# Altium PCB ShieldBoard.PcbDoc
Units mil, origin at the board's own origin, x right, y up, seen from the top; angles counter-clockwise.
Board outline 2700 x 2100 mil, 2 copper layers (Top Layer, Bottom Layer), stack 62.8 mil thick; 15 components, 31 nets, 62 pads, 18 vias.
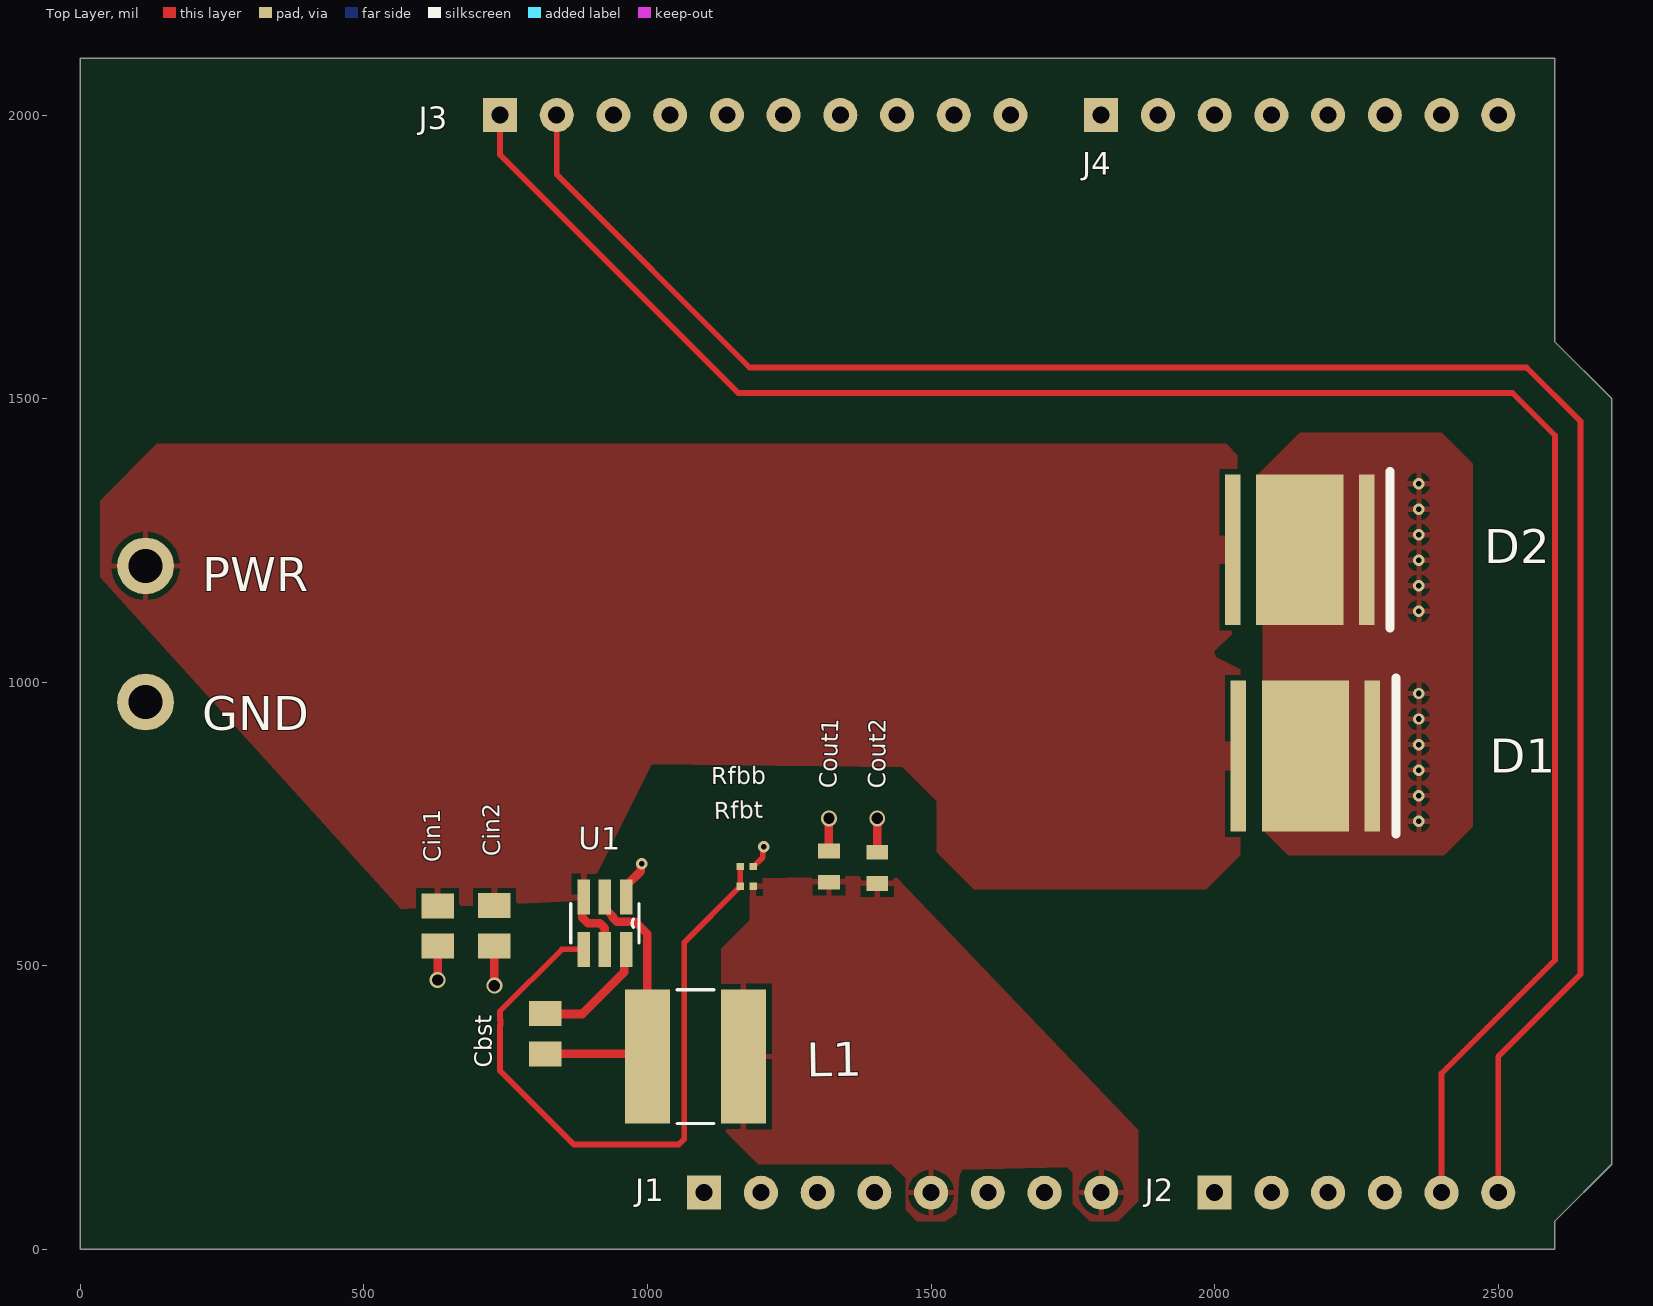
[diagram p0: Top Layer view]
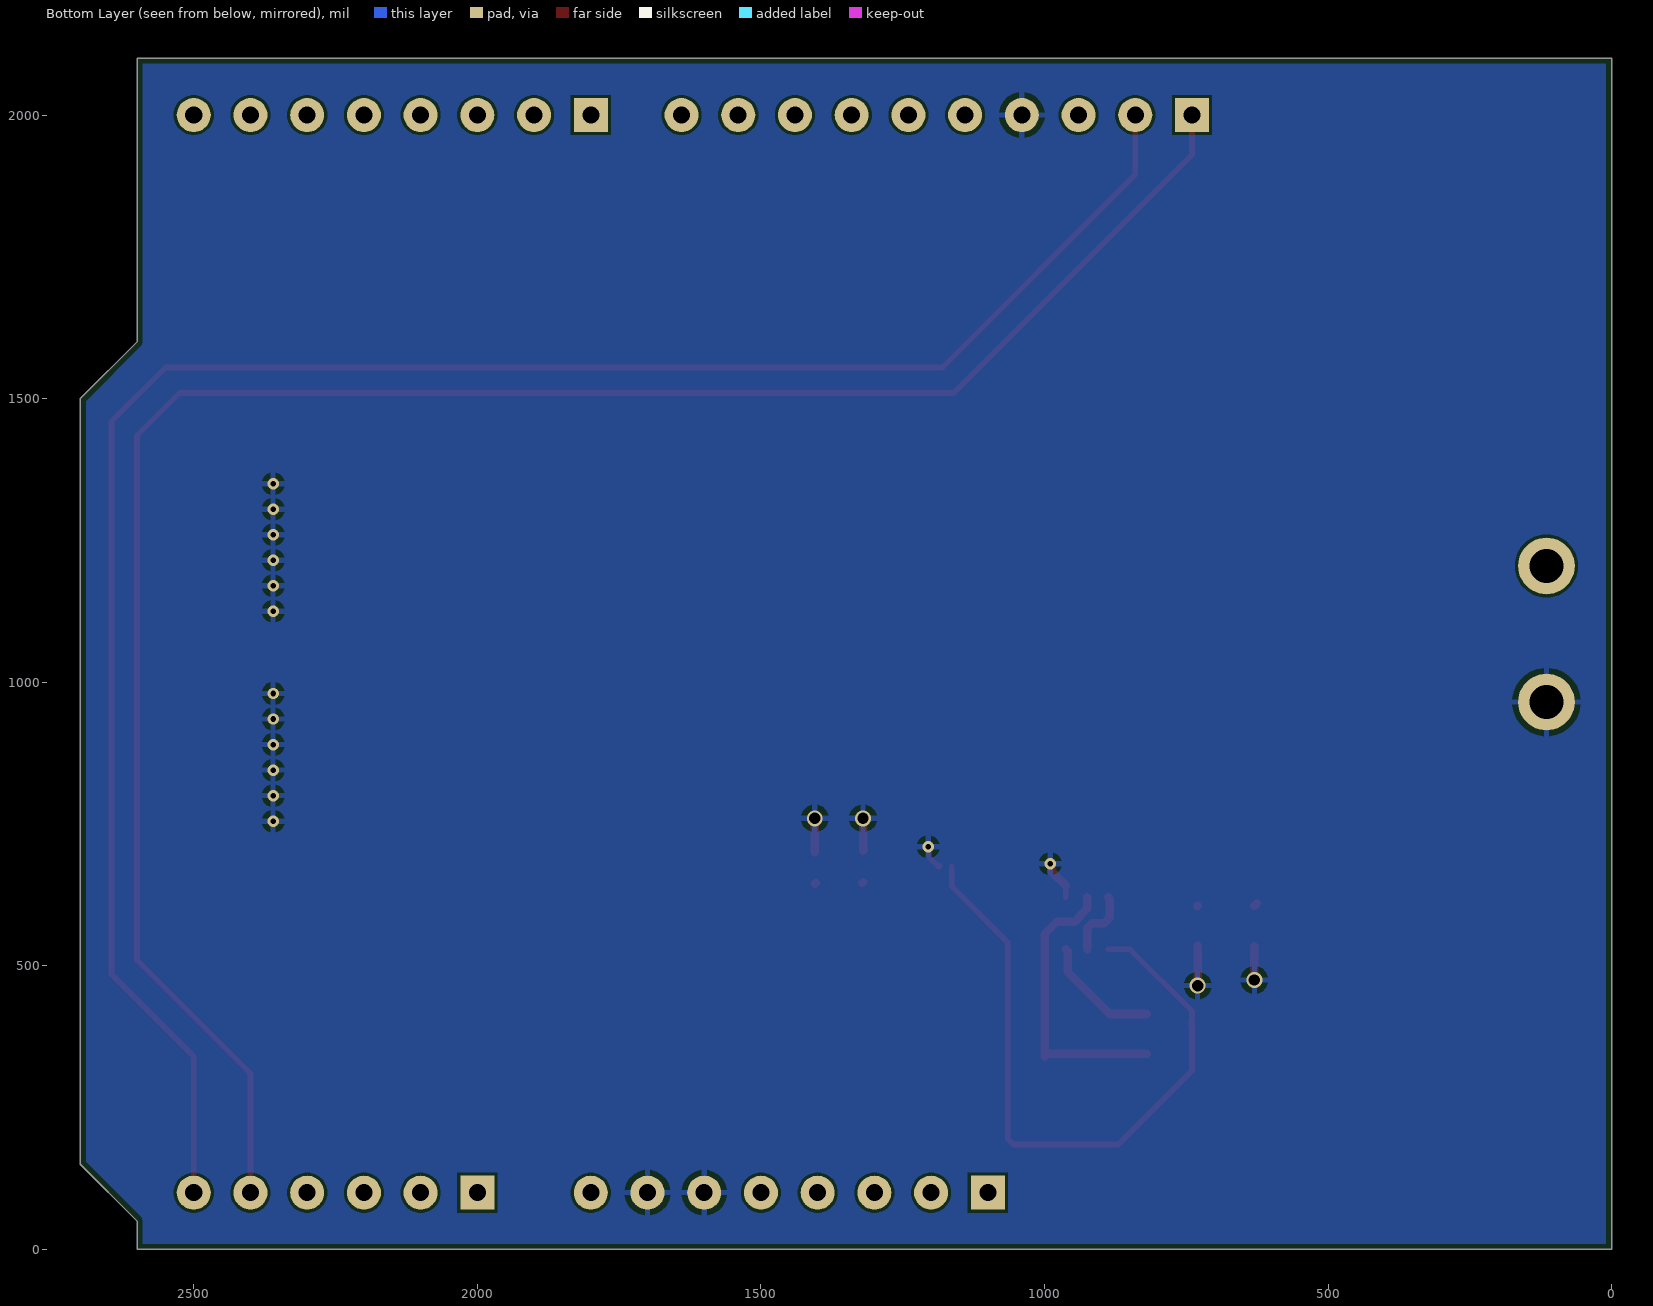
[diagram p1: Bottom Layer view, seen from below]

## Layer stack, top to bottom
Top Solder: solder mask 0.4, Solder Resist, Dk 3.5
Top Layer: signal copper 1.4
Dielectric 1: dielectric 60, FR-4, Dk 4.8
Bottom Layer: signal copper 1.4
Bottom Solder: solder mask 0.4, Solder Resist, Dk 3.5

## Board outline
2600,1600 2700,1500 2700,150 2600,50 2600,0 0,0 0,2100 2600,2100

## Design rules (kind name [scope] priority, off if disabled: settings)
BoardOutlineClearance [All] p1: gap=10 ignorepadtopadclearanceinfootprint=FALSE
Clearance [All] p1: gap=5 ignorepadtopadclearanceinfootprint=TRUE except(0: Arc-Hole Track-Hole SMDPad-Hole THPad-Hole Via-Hole Fill-Hole Poly-Hole Region-Hole Text-Hole)
HoleToHoleClearance [All] p1: gap=5 allowstackedmicrovias=TRUE
MinimumSolderMaskSliver [All] p1: minsoldermaskwidth=5
PolygonConnect [All] p1: connectstyle=Relief reliefconductorwidth=10 reliefentries=4 polygonreliefangle="90 Angle" airgapwidth=10
RoutingVias [All] p1: holewidth=10 width=18 viastyle="Through Hole" minholewidth=6 minwidth=14 maxholewidth=28 maxwidth=50
SilkToSilkClearance [All] p1: silktosilkclearance=5
SilkToSolderMaskClearance [IsPad] p1: minsilkscreentomaskgap=5 clearancetoexposedcopper=TRUE
SolderMaskExpansion [All] p1: expansion=0 istentingtop=FALSE
Width [All] p1: maxlimit=30 minlimit=10 preferedwidth=10
26 further rules are at their usual default settings.

## Components (designator, comment, footprint, x,y, rotation, side; value= is the part's Value field where it differs from the comment)
Cbst "08053C104KAT2A" 0805 820,380 r90 top value=Value
Cin1 "C2012X5R1V106K08" 0805 730,570.5 r270 top value=Value
Cin2 "C2012X5R1V106K08" 0805 630,570 r270 top value=Value
Cout1 "C1608X5R1A226M08" 0603 1320,675 r90 top value=Value
Cout2 "C1608X5R1A226M08" 0603 1405,672.5 r90 top value=Value
D1 "MKRAWT-00-0000-0D0HG230H" CREE-MK-R-2_V 2160,870 r0 top
D2 "MKRAWT-00-0000-0D0HG230H" CREE-MK-R-2_V 2150,1233.5 r0 top
J1 "1x8 Header" PCBComponent_2 1100,100 r0 top
J2 "1x6 Header" PCBComponent_1 2000,100 r0 top
J3 "1x10 Header" PCBComponent_3 740,2000 r0 top
J4 "1x8 Header" PCBComponent_2 1800,2000 r0 top
L1 "SRN6045-4R7Y" SRN6045 1084.65,340 r0 top value=Value
Rfbb "RC0201FR-0710KL" 0201 1175,675 r0 top value=Value
Rfbt "RC0201FR-0756K2L" 0201 1175,640 r180 top value=Value
U1 "TPS562200DDCR" DDC0006A 925,575 r270 top value=Value

## Footprints (in the part's own frame and the unit in brackets; to place one, negate y for a bottom-side part, rotate by r counter-clockwise, add the part's x,y. Pads: shape width x height; smd on the part's side, far side on the other; paste and mask are expansions set on the pad)
0201 [mil]
  rect 14x13 smd: 1(-11.5,0) 2(11.5,0)
  body extent 0,0 10,10, height 10
0603 [mil]
  rect 26x38 smd: 1(-27.5,0) 2(27.5,0)
  body extent 0,0 10,10, height 10
0805 [mil]
  rect 44x57 smd: 1(-35.5,0) 2(35.5,0)
  body extent 0,0 10,10, height 10
CREE-MK-R-2_V [mm] "SMD, 2-Leads, Body 7x7mm, Thermal Pad 3.9x6.76mm"
  rect 0.7x6.76 smd: 1(-3,0) 2(3,0)
  rect 3.9x6.76 smd: 3(0,0)
  silkscreen extent 4.05,-3.5 4.05,3.5, body extent -3.5,-3.5 3.5,3.5, height 4.1
DDC0006A [mil]
  rect 62x22 smd paste-4 mask+2: 1(-46,37.4) 2(-46,0) 3(-46,-37.4) 4(46,-37.4) 5(46,0) 6(46,37.4)
  silkscreen extent -35,-60 35,60, body extent 0,0 10,10, height 10
PCBComponent_1 [mil]
  rect 60x60 hole 30: 1(0,0)
  round 60 hole 30: 2(100,0) 3(200,0) 4(300,0) 5(400,0) 6(500,0)
PCBComponent_2 [mil]
  rect 60x60 hole 30: 1(0,0)
  round 60 hole 30: 2(100,0) 3(200,0) 4(300,0) 5(400,0) 6(500,0) 7(600,0) 8(700,0)
PCBComponent_3 [mil]
  rect 60x60 hole 30: 1(0,0)
  round 60 hole 30: 2(100,0) 3(200,0) 4(300,0) 5(400,0) 6(500,0) 7(600,0) 8(700,0) 9(800,0) 10(900,0)
SRN6045 [mm]
  rect 2x6 smd: 1(-2.15,0) 2(2.15,0)
  silkscreen extent -0.82,-3 0.82,3, body extent 0,0 0.25,0.25, height 0.25

## Part data
Cbst L1 Rfbb Rfbt: "No Description Available", Copyright="Copyright (C) 2018 Accelerated Designs. All rights reserved", RefDes=RefDes, TYPE=TYPE
  Cbst: Manufacturer_Part_Number=08053C104KAT2A, Vendor=AVX
  L1: Manufacturer_Part_Number=SRN6045-4R7Y, Vendor=Bourns
  Rfbb: Manufacturer_Part_Number=RC0201FR-0710KL, Vendor="Yageo America"
  Rfbt: Manufacturer_Part_Number=RC0201FR-0756K2L, Vendor="Yageo America"
Cin1 Cin2: "No Description Available", Manufacturer_Part_Number=C2012X5R1V106K085AC, Copyright="Copyright (C) 2018 Accelerated Designs. All rights reserved", RefDes=RefDes, TYPE=TYPE, Vendor=TDK
Cout1 Cout2: "No Description Available", Manufacturer_Part_Number=C1608X5R1A226M080AC, Copyright="Copyright (C) 2018 Accelerated Designs. All rights reserved", RefDes=RefDes, TYPE=TYPE, Vendor=TDK
D1 D2: library part CMP-2100-00980-1, "LED, White, 12 V, 2-Pin SMD, RoHS, Tape and Reel"
J1 J4: library part 8-Pin-Header, Manufacturer Part Number=SSQ-108-03-T-S
J2: library part 6-Pin-Header, Manufacturer Part Number=SSQ-106-03-T-S
J3: library part 10-Pin-Header, Manufacturer Part Number=SSQ-110-03-T-S
U1: "No Description Available", Alternate_Manufacturer=None, CurrentDate="Not shown in title block", Manufacturer="Texas Instruments", PartNumber=TPS562200DDC, Address1="Not shown in title block", Address2="Not shown in title block", Address3="Not shown in title block", Address4="Not shown in title block", ApprovedBy="Not shown in title block", Author="Not shown in title block", CheckedBy="Not shown in title block", CompanyName="Not shown in title block", ComponentLink1Description="Datasheet Link", ComponentLink1URL=https://sps06.itg.ti.com/sites/KMS/crossdivteams/altium/docs/ComponentDatasheets/TPS562200_DS_v08_13_0909.docx, CompType=IC, Copyright="Copyright (C) 2018 Accelerated Designs. All rights reserved", CurrentTime="Not shown in title block", Date="Not shown in title block", DocumentFullPathAndName="Not shown in title block", DocumentName="Not shown in title block", DocumentNumber=1, Engineer="Not shown in title block", ImagePath="Not shown in title block", LatestRevisionDate=2014-02-20, ModifiedDate="Not shown in title block", MountType=SMT, Organization="Not shown in title block", PackageReference=DDC0006A, PIN_COUNT=6, Publisher="Texas Instruments", RefDes=Refdes, Revision="Use project parameter SCH_Rev", RoHS=Y, SheetNumber=1, SheetTotal=1, SymbolCreator=a0411947, SymbolVersion=2013-09-26, Time="Not shown in title block", TYPE=Type, U/M=EA

## Free pads (board coordinates)
  round 100 hole 60: 10(115,965) 10(115,1205)

## Via types
v1: diameter 20, hole 10, Top Layer to Bottom Layer, 14 vias
v2: diameter 28, hole 20, Top Layer to Bottom Layer, 4 vias

## Nets (pads, with @x,y where several pads share a name; then routed paths per layer and width w, separated by ;. In a path a pad name is that pad's centre, name@x,y a point inside that pad or via, vN(x,y) a via of type N, cw(c..) or ccw(c..) an arc to the next point about the centre after c; other vN are vias at no path point)
3.3V: J1.4
+5: Cout1.1 Cout2.1 J1.5 J1.8 L1.2 Rfbt.1 | length 3.5
  Top Layer w15: Cout1.1 Cout1.1@1321.25,646.25 ; Cout2.1@1403.75,646.25 Cout2.1
+12: Cin1.1 Cin2.1 D1.1 D2.1 pad.10@115,1205 U1.3 U1.5 | length 130.6
  Top Layer w15: Cin2.1@625.5,610 Cin2.1 Cin2.1@630.25,605.75 ; Cin1.1@729.75,605.75 Cin1.1 Cin1.1@731,605 ; U1.3 885,618.4 885,585 895,575 916.21,575 925,566.21 U1.5
A0: J2.1
A1: J2.2
A2: J2.3
A3: J2.4
A4: J2.5 J3.1 | length 3552.9
  Top Layer w10: J3.1 740,1930 1160,1510 2525,1510 2600,1435 2600,510 2400,310 J2.5
A5: J2.6 J3.2 | length 3510.2
  Top Layer w10: J3.2 840,1895 1180,1555 2550,1555 2645,1460 2645,485 2500,340 J2.6
AREF: J3.3
D0: J4.8
D1: J4.7
D2: J4.6
D3: J4.5
D4: J4.4
D5: J4.3
D6: J4.2
D7: J4.1
D8: J3.10
D9: J3.9
D10: J3.8
D11: J3.7
D12: J3.6
D13: J3.5
GND: Cin1.2 Cin2.2 Cout1.2 Cout2.2 D1.2 D1.3 D2.2 D2.3 J1.6 J1.7 J3.4 pad.10@115,965 Rfbb.2 U1.1 | length 363
  Top Layer w10: U1.1 U1.1@962.4,641 ; v1@988.09,678.09 v1(990,680) ; Rfbb.2@1184.5,676.5 1186,675 Rfbb.2 1187,675 1203.09,691.09 1203.09,708.09 v1(1205,710)
  Top Layer w15: v2(630,475) Cin2.2 ; v2(730,465) Cin1.2 ; U1.1@962.4,641 988.09,666.69 v1@988.09,678.09 ; Cout1.2 v2(1320,760) ; Cout2.2 v2(1405,760)
  other v1: 2360,755 2360,800 2360,845 2360,890 2360,935 2360,980 2360,1125 2360,1170 2360,1215 2360,1260 2360,1305 2360,1350
IOREF: J1.2
N-C: J1.1
NetCbst_1: Cbst.1 L1.1 U1.2 | length 512.9
  Top Layer w10: L1.1@995.5,344.5 L1.1
  Top Layer w15: Cbst.1 L1.1@995.5,344.5 ; U1.2 925,601 938.9,587.1 938.9,584.82 946.22,577.5 978.58,577.5 1000,556.08 L1.1
NetCbst_2: Cbst.2 U1.6 | length 211.3
  Top Layer w15: Cbst.2 820.5,415 885,415 958.9,488.9 958.9,525.5 U1.6
NetRfbb_1: Rfbb.1 Rfbt.2 U1.4 | length 1202.5
  Top Layer w10: U1.4 849,529 740,420 740,405 740.86,404.14 740.86,395.86 740,395 740,315 870,185 1055,185 1065,195 1065,541.5 1161.5,638 1161.5,638.5 1163,640 Rfbt.2 Rfbb.1
RESET: J1.3

## Polygon pours and split planes (outlines as drawn)
+12 on Top Layer "`" (solid, pour order 6): 565.65,599.79 35,1185 35,1320 135,1420 2020,1420 2040,1400 2040,1095 1998.57,1053.57 2002.51,1043.72 2045,1022.63 2045,695 1985,635 1575,635 1510,700 1510,790 1450,850 1007.52,855.03 887.56,615.12
+5 on Top Layer "`" (solid, pour order 7): 1550,130 1555,140 1740,145 1750,135 1750,80 1780,50 1830,50 1865,85 1865,210 1435,660 1180,653.97 1180,580 1130,530 1130,215 1195,150 1430,150 1455,125 1455,70 1475,50 1520,50 1525,50 1544.88,63.26
GND on Top Layer "`" (solid, pour order 3): 2085,740 2130,695 2405,695 2455,745 2455,1385 2400,1440 2150,1440 2125,1415 2075,1365 2085,1355
GND on Bottom Layer "`" (solid, pour order 0): 2600,-10 2600,40 2700,140 2700,1490 2600,1590 2600,2090 0,2090 0,-10

## Silkscreen, mask and mechanical layers (free items; w line width, h text height)
Top Overlay:
  text "PWR" at 215,1160 h60
  text "GND" at 215,915 h60